# EAGLE board th_simple_ad (EAGLE 7.2.0)

Size 100 x 80 mm. Coordinates in mm from the lower left corner, seen from the top.
Outline: 0,0 100,0 100,80 0,80 0,0
Copper layers (1*16): Top 0.035mm / dielectric 1.5mm / Bottom 0.035mm
Design rules "default": minimum track width 10mil, minimum drill 24mil, track to track 8mil, track to pad 8mil, pad to pad 8mil, via to via 8mil, smd to smd 8mil, copper to edge 40mil, drill to drill 8mil, minimum pad ring 10mil, minimum via ring 8mil, stop-mask expansion 4mil, vias tented up to drill 0mil, thermal gap 10mil

## Footprints (pad centres in the part's own frame; a part is rotated, then mirrored left to right if it is on the bottom)
3RP/1610N = drill 1.2 pad 2.184: 1 -5,0; 2 0,0; 3 5,0
B45181A = drill 0.813 pad 1.6: + -1.27,0 | drill 0.813 pad 1.6 octagon: - 1.27,0
C050-024X044 = drill 0.813 octagon: 1 -2.54,0; 2 2.54,0
DO35-7 = drill 0.813 long: A 3.81,0; C -3.81,0
ERTHENVAR-JACK-90DEG = drill 1.3 pad 2.54 long: P$1 5,-2.5; P$2 -0.2,-13.5; P$3 5,-15.7 | hole 1.3: 5.842,-2.489; 4.14,-2.489; -0.203,-12.649; -0.203,-14.351; 5.842,-15.697; 4.166,-15.697
DIL08 = drill 0.813 pad 1.27: 1 -3.81,-3.81; 2 -1.27,-3.81; 3 1.27,-3.81; 4 3.81,-3.81; 5 3.81,3.81; 6 1.27,3.81; 7 -1.27,3.81; 8 -3.81,3.81
DIL08-ROUND = drill 0.813 pad 1.676: 1 -3.81,-3.81; 2 -1.27,-3.81; 3 1.27,-3.81; 4 3.81,-3.81; 5 3.81,3.81; 6 1.27,3.81; 7 -1.27,3.81; 8 -3.81,3.81
POWER_16 = drill 1.016 pad 1.88 octagon: 1 -6.35,-1.27; 2 -6.35,1.27; 3 -3.81,-1.27; 4 -3.81,1.27; 5 -1.27,-1.27; 6 -1.27,1.27; 7 1.27,-1.27; 8 1.27,1.27; 9 3.81,-1.27; 10 3.81,1.27; 11 6.35,-1.27; 12 6.35,1.27; 13 8.89,-1.27; 14 8.89,1.27; 15 11.43,-1.27; 16 11.43,1.27
0207/10 = drill 0.813 octagon: 1 -5.08,0; 2 5.08,0
TO92 = drill 0.813 octagon: 1 1.27,0; 2 0,1.905; 3 -1.27,0
FB = drill 0.8 pad 1.93: P$1 -2.5,0; P$2 2.5,0

## Placement (x,y rotation side)
ATTACK  [3RP/1610N]  -58.42,13.97 0 top  (outside the outline)
C1  10u  [B45181A]  -33.02,50.8 0 top  (outside the outline)
C2  10u  [B45181A]  -43.18,50.8 0 top  (outside the outline)
C3  4u7  [B45181A]  -53.34,50.8 0 top  (outside the outline)
C5  100p  [C050-024X044]  -26.67,62.23 0 top  (outside the outline)
C6  100n  [C050-024X044]  -34.29,62.23 0 top  (outside the outline)
C7  10n  [C050-024X044]  -41.91,62.23 0 top  (outside the outline)
D1  1N4148DO35-7  [DO35-7]  -57.15,62.23 0 top  (outside the outline)
D2  1N4148DO35-7  [DO35-7]  -24.13,68.58 0 top  (outside the outline)
DECAY  [3RP/1610N]  -21.59,40.64 0 top  (outside the outline)
GATE  AUDIO-JACK  [ERTHENVAR-JACK-90DEG]  -22.86,17.78 0 top  (outside the outline)
IC1  TL071P  [DIL08]  -57.15,31.75 0 top  (outside the outline)
IC2  LM555N  [DIL08-ROUND]  -19.05,53.34 0 top  (outside the outline)
OUT1  AUDIO-JACK  [ERTHENVAR-JACK-90DEG]  -35.56,17.78 0 top  (outside the outline)
PWR1  POWER  [POWER_16]  -43.18,33.02 0 top  (outside the outline)
R1  100k  [0207/10]  -49.53,67.31 0 top  (outside the outline)
R2  2k  [0207/10]  -62.23,67.31 0 top  (outside the outline)
R5  2k2  [0207/10]  -19.05,73.66 0 top  (outside the outline)
R6  100k  [0207/10]  -31.75,73.66 0 top  (outside the outline)
R7  100k  [0207/10]  -44.45,73.66 0 top  (outside the outline)
T1  2N3904  [TO92]  -40.64,67.31 0 top  (outside the outline)
TRIG  AUDIO-JACK  [ERTHENVAR-JACK-90DEG]  -48.26,17.78 0 top  (outside the outline)
U$1  FB  [FB]  -60.96,50.8 0 top  (outside the outline)
U$2  FB  [FB]  -17.78,60.96 0 top  (outside the outline)

## Library data of the parts
ATTACK DECAY = pot
C1-C3 C5-C7 R1 R2 R5-R7 = rcl
D1 D2 = diode
GATE OUT1 TRIG = erthenvar
IC1 = linear
IC2 U$1 U$2 = adafruit
PWR1 = eurorack
T1 = transistor

## Nets
+12V: C1.+ C6.2 IC1.7 IC2.4 IC2.8 R7.2 U$1.P$2
-12V: C2.- IC1.4 U$2.P$2
GND: C1.- C2.+ C3.- C6.1 C7.2 D1.A GATE.P$1 IC2.1 OUT1.P$1 PWR1.3 PWR1.4 PWR1.5 PWR1.6 PWR1.7 PWR1.8 R1.1 R5.1 T1.3 TRIG.P$1
N$1: PWR1.9 PWR1.10 U$1.P$1
N$2: PWR1.1 PWR1.2 U$2.P$1
N$3: OUT1.P$3 R2.1 R5.2
N$5: IC1.2 IC1.6 IC2.6 R2.2
N$6: D1.C R6.1 T1.2
N$7: IC2.2 R7.1 T1.1
N$8: D2.A IC2.3
N$9: ATTACK.2 ATTACK.3 D2.C
N$10: C7.1 IC2.5
N$11: DECAY.2 DECAY.3 IC2.7
N$12: GATE.P$2 PWR1.15 PWR1.16
N$13: C5.2 TRIG.P$3
N$14: C5.1 GATE.P$3 R1.2 R6.2
N$16: ATTACK.1 C3.+ DECAY.1 IC1.3

## Tracks (layer width: path | path; a pad name or v marks a point on that pad's centre or on a via)
+12V  (6 unrouted)
-12V  (2 unrouted)
GND  (18 unrouted)
N$1  (2 unrouted)
N$2  (2 unrouted)
N$3  (2 unrouted)
N$5  (3 unrouted)
N$6  (2 unrouted)
N$7  (2 unrouted)
N$8  (1 unrouted)
N$9  (2 unrouted)
N$10  (1 unrouted)
N$11  (2 unrouted)
N$12  (2 unrouted)
N$13  (1 unrouted)
N$14  (3 unrouted)
N$16  (3 unrouted)